# EAGLE board MCS (EAGLE 6.6.0)
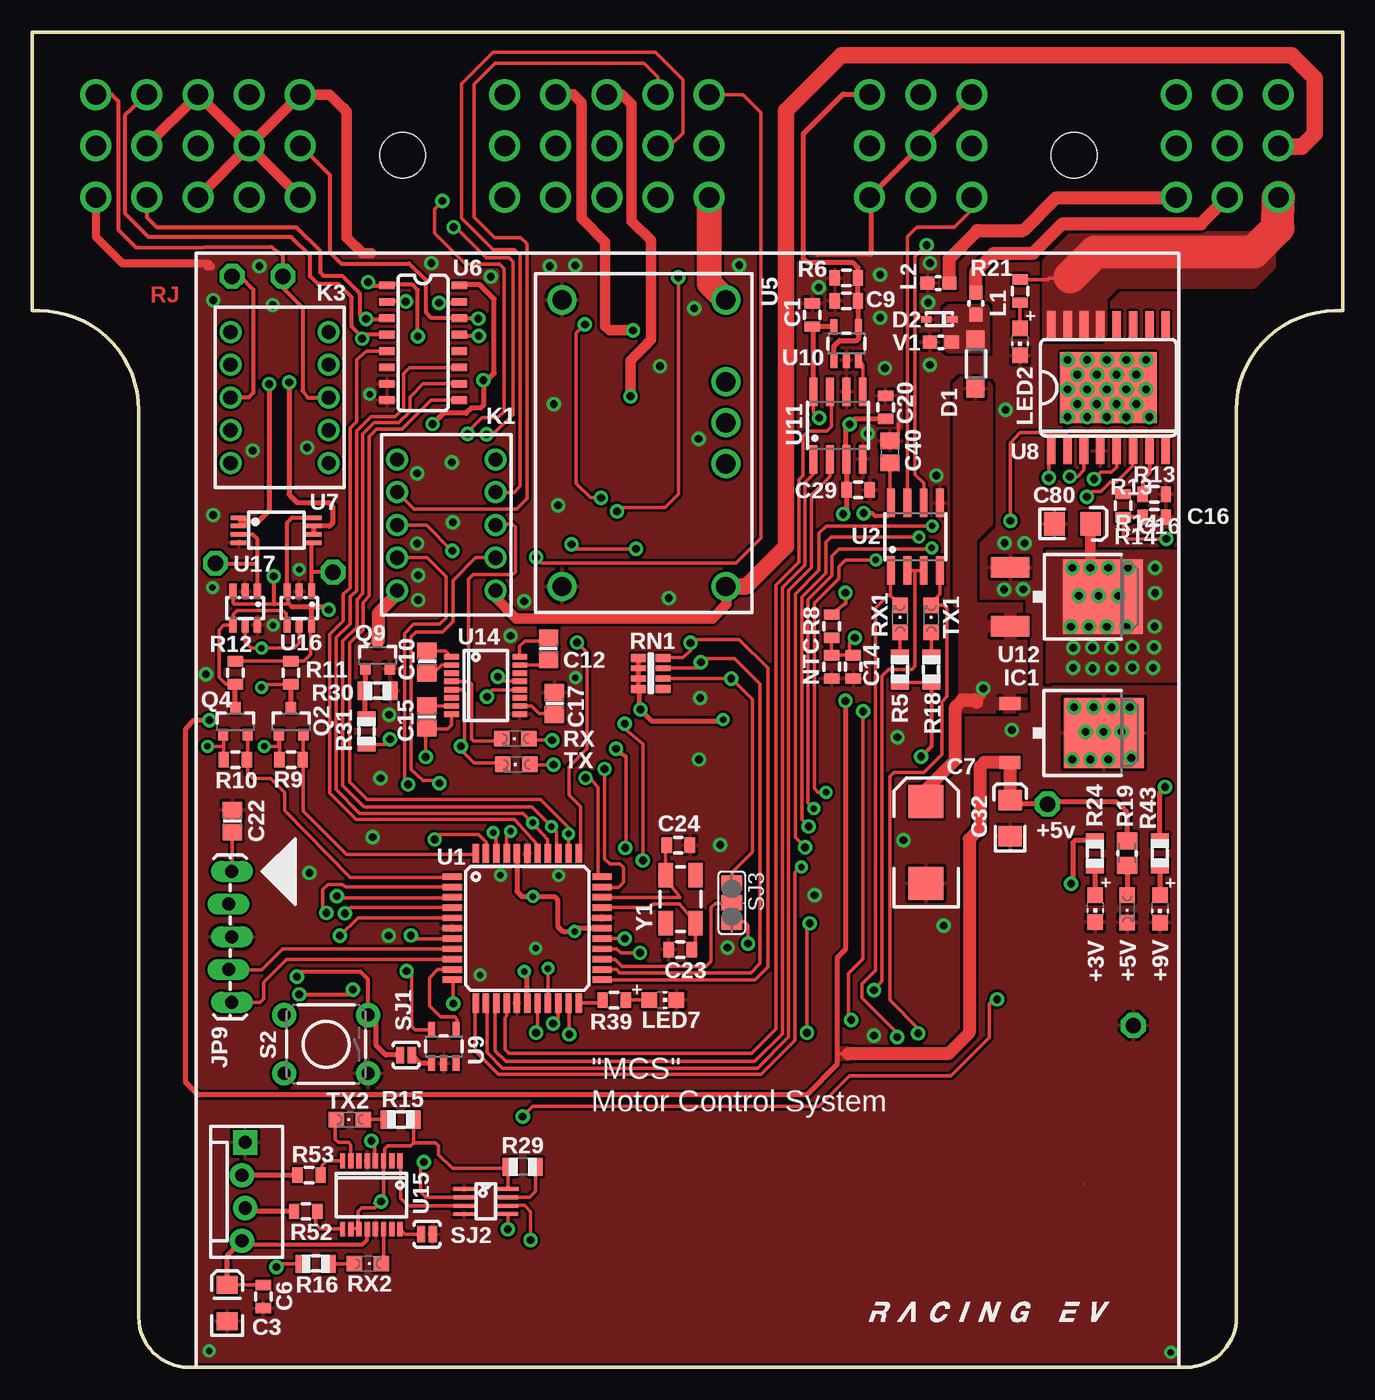
[diagram p0: board, top side]
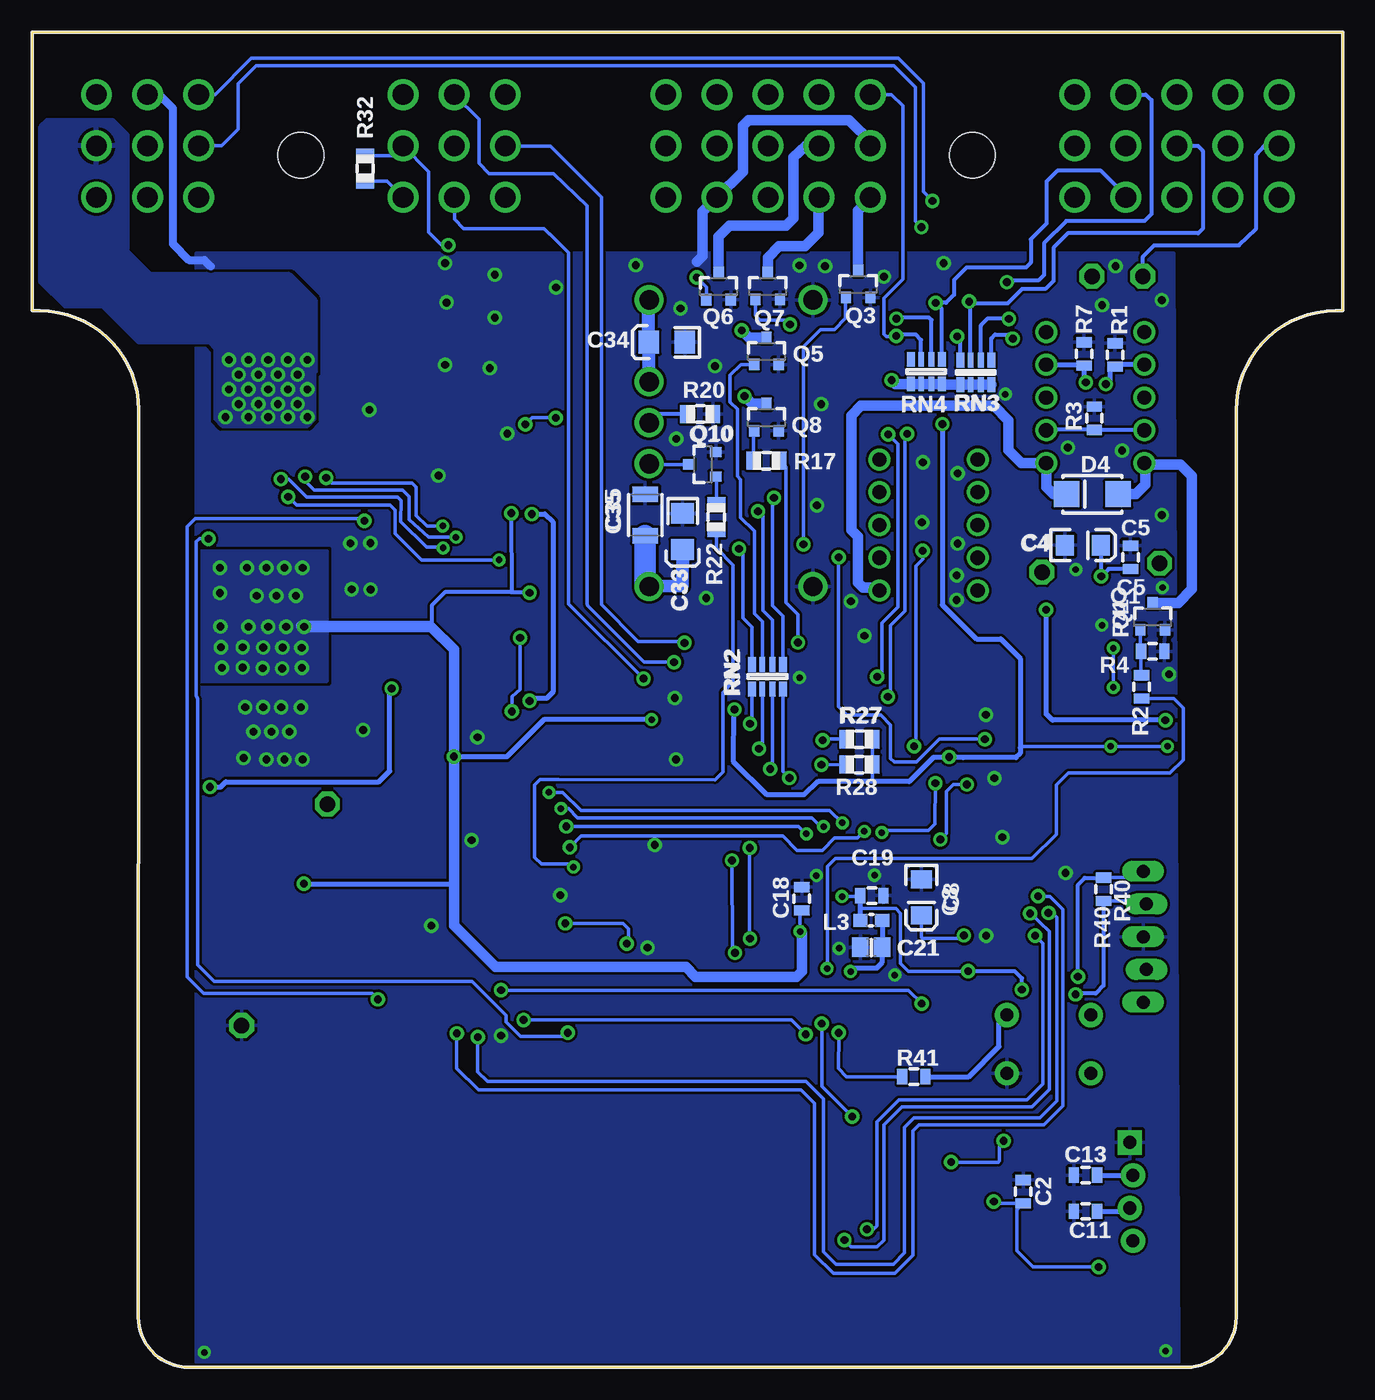
[diagram p1: board, bottom side, seen from below]

Size 101.6 x 103.51 mm. Coordinates in mm from the lower left corner, seen from the top.
Copper layers (1*16): Top 0.035mm / dielectric 1.5mm / Bottom 0.035mm
Design rules "SparkFun": minimum track width 8mil, minimum drill 20mil, track to track 8mil, track to pad 8mil, pad to pad 8mil, via to via 8mil, smd to smd 8mil, copper to edge 10mil, drill to drill 8mil, minimum pad ring 12mil, minimum via ring 10mil, stop-mask expansion 4mil, vias tented up to drill 25mil, thermal gap 10mil

## Footprints (pad centres in the part's own frame; a part is rotated, then mirrored left to right if it is on the bottom)
CHIP-LED0805 = smd 1.2 x 1.2: A 0,-1.05; C 0,1.05
CHIPLED_0805 = smd 1.2 x 1.2: A 0,-1.05; C 0,1.05
0805 = smd 0.8 x 1.2: 1 -0.9,0; 2 0.9,0
EIA3216 = smd 1.4 x 1.6: A 1.4,0; C -1.4,0
EIA7343 = smd 2.55 x 2.7: A 3.17,0; C -3.17,0
C0805 = smd 1.3 x 1.5: 1 -0.85,0; 2 0.85,0
POLC1206 = smd 1.6 x 1.8: 1 -1.4,0; 2 1.4,0
1210 = smd 1.2 x 2: 1 -1.6,0; 2 1.6,0
581-01-48-009 = drill 1.6: 1 -45.872,4.699; 2 -45.872,0.711; 3 -45.872,-3.277; 4 -41.91,4.699; 5 -41.91,0.711; 6 -41.91,-3.277; 7 -37.948,4.699; 8 -37.948,0.711; 9 -37.948,-3.277; 10 -33.985,4.699; 11 -33.985,0.711; 12 -33.985,-3.277; 13 -30.023,4.699; 14 -30.023,0.711; 15 -30.023,-3.277; 16 -14.173,4.699; 17 -14.173,0.711; 18 -14.173,-3.277; 19 -10.211,4.699; 20 -10.211,0.711; 21 -10.211,-3.277; 22 -6.248,4.699; 23 -6.248,0.711; 24 -6.248,-3.277; 25 -2.286,4.699; 26 -2.286,0.711; 27 -2.286,-3.277; 28 1.676,4.699; 29 1.676,0.711; 30 1.676,-3.277; 31 14.122,4.699; 32 14.122,0.711; 33 14.122,-3.277; 34 18.085,4.699; 35 18.085,0.711; 36 18.085,-3.277; 37 22.047,4.699; 38 22.047,0.711; 39 22.047,-3.277; 40 37.897,4.699; 41 37.897,0.711; 42 37.897,-3.277; 43 41.859,4.699; 44 41.859,0.711; 45 41.859,-3.277; 46 45.822,4.699; 47 45.822,0.711; 48 45.822,-3.277 | hole 3.556: -22.098,0; 29.972,0
SOD123 = smd 1.4 x 1.4: A 1.9,0; C -1.9,0
SOD-523F = smd 0.8 x 0.5: A -1,0; C 1,0
SMA-DIODE_ALT = smd 2 x 2: A -2,0; C 2,0
TO252 = smd 1 x 1.6: 1 -2.28,-4.8; 2 2.28,-4.8 | smd 5.4 x 6.2: 3 0,2.5
1X05_LOCK_LONGPADS = drill 1.016 long: 1 0,0; 2 2.54,-0.254; 3 5.08,0; 4 7.62,-0.254; 5 10.16,0
MOLEX-1X4_LOCK = drill 1.016 pad 1.88 square: 1 0,0.127 | drill 1.016 pad 1.88: 2 2.54,-0.127; 3 5.08,0.127; 4 7.62,-0.127
TQ2-2M-24V = drill 1.1: 1 -5.08,-3.81; 2 -2.54,-3.81; 3 0,-3.81; 4 2.54,-3.81; 5 5.08,-3.81; 6 5.08,3.81; 7 2.54,3.81; 8 0,3.81; 9 -2.54,3.81; 10 -5.08,3.81
0603 = smd 1.1 x 1: 1 -0.85,0; 2 0.85,0
SOT23-3 = smd 0.8 x 0.9: 1 -0.95,-1; 2 0.95,-1; 3 0,1.1
R0805 = smd 1.1 x 1.4: 1 -1,0; 2 1,0
M0805 = smd 1.3 x 1.6: 1 -0.95,0; 2 0.95,0
CRA06S = smd 0.63 x 1.15: 1 -1.2,-1; 4 1.2,-1; 5 1.2,0.9; 8 -1.2,0.9 | smd 0.44 x 1.15: 2 -0.4,-1; 3 0.4,-1; 6 0.4,0.9; 7 -0.4,0.9
TACTILE-PTH = drill 1.016 pad 1.88: 1 -3.251,2.261; 2 3.251,2.261; 3 -3.251,-2.261; 4 3.251,-2.261
SJ_2S-NO = smd 0.635 x 1.27: 1 -0.45,0; 2 0.45,0
PAD-JUMPER-2-NO_YES_SILK = smd 0.635 x 1.27: 1 -0.45,0; 2 0.45,0
PAD-JUMPER-3-NO_YES_SILK_FULL_BOX = smd 1.168 x 1.6: 1 -1.524,0; 2 0,0; 3 1.524,0
4952 = drill 1.2 pad 1.93 octagon: P$1 0,0
TQFP-44 = smd 1.5 x 0.5: 1 -5.8,4; 2 -5.8,3.2; 3 -5.8,2.4; 4 -5.8,1.6; 5 -5.8,0.8; 6 -5.8,0; 7 -5.8,-0.8; 8 -5.8,-1.6; 9 -5.8,-2.4; 10 -5.8,-3.2; 11 -5.8,-4; 23 5.8,-4; 24 5.8,-3.2; 25 5.8,-2.4; 26 5.8,-1.6; 27 5.8,-0.8; 28 5.8,0; 29 5.8,0.8; 30 5.8,1.6; 31 5.8,2.4; 32 5.8,3.2; 33 5.8,4 | smd 0.5 x 1.5: 12 -4,-5.8; 13 -3.2,-5.8; 14 -2.4,-5.8; 15 -1.6,-5.8; 16 -0.8,-5.8; 17 0,-5.8; 18 0.8,-5.8; 19 1.6,-5.8; 20 2.4,-5.8; 21 3.2,-5.8; 22 4,-5.8; 34 4,5.8; 35 3.2,5.8; 36 2.4,5.8; 37 1.6,5.8; 38 0.8,5.8; 39 0,5.8; 40 -0.8,5.8; 41 -1.6,5.8; 42 -2.4,5.8; 43 -3.2,5.8; 44 -4,5.8
SO-8 = smd 0.61 x 2.21: 1 -1.905,-2.616; 2 -0.635,-2.616; 3 0.635,-2.616; 4 1.905,-2.616; 5 1.905,2.616; 6 0.635,2.616; 7 -0.635,2.616; 8 -1.905,2.616
VFSOP-8 = smd 0.3 x 1.6: 1 -0.98,-1.7; 2 -0.33,-1.7; 3 0.33,-1.7; 4 0.98,-1.7; 5 0.97,1.69; 6 0.325,1.7; 7 -0.33,1.7; 8 -0.98,1.71
PTN78060HAH = drill 1.5: 1 2.032,14.732; 2 2.032,2.032; 3 11.557,2.032; 4 14.732,2.032; 5 17.907,2.032; 6 24.257,2.032; 7 24.257,14.732
SO016 = smd 0.6 x 1.2: 1 -4.445,-2.8; 2 -3.175,-2.8; 3 -1.905,-2.8; 4 -0.635,-2.8; 5 0.635,-2.8; 6 1.905,-2.8; 7 3.175,-2.8; 8 4.445,-2.8; 9 4.445,2.8; 10 3.175,2.8; 11 1.905,2.8; 12 0.635,2.8; 13 -0.635,2.8; 14 -1.905,2.8; 15 -3.175,2.8; 16 -4.445,2.8
TSSOP-08 = smd 1.2 x 0.35: 1 -2.925,0.975; 2 -2.925,0.325; 3 -2.925,-0.325; 4 -2.925,-0.975; 5 2.925,-0.975; 6 2.925,-0.325; 7 2.925,0.325; 8 2.925,0.975
SO-16-POWER = smd 2.032 x 0.66: 1 -4.902,4.445; 2 -4.902,3.175; 3 -4.902,1.905; 4 -4.902,0.635; 5 -4.902,-0.635; 6 -4.902,-1.905; 7 -4.902,-3.175; 8 -4.902,-4.445; 9 4.902,-4.445; 10 4.902,-3.175; 11 4.902,-1.905; 12 4.902,-0.635; 13 4.902,0.635; 14 4.902,1.905; 15 4.902,3.175; 16 4.902,4.445 | smd 5.5 x 7.5: EP 0,0
SOT23-5L = smd 0.55 x 1.2: 1 -0.95,-1.3; 2 0,-1.3; 3 0.95,-1.3; 4 0.95,1.3; 5 -0.95,1.3
SOT23-5 = smd 0.55 x 1.2: 1 -0.95,-1.3; 2 0,-1.3; 3 0.95,-1.3; 4 0.95,1.3; 5 -0.95,1.3
SO08 = smd 0.61 x 2.21: 1 -1.905,-2.616; 2 -0.635,-2.616; 3 0.635,-2.616; 4 1.905,-2.616; 5 1.905,2.616; 6 0.635,2.616; 7 -0.635,2.616; 8 -1.905,2.616
V-REG_DPACK = smd 1.6 x 3: 1 -2.28,-4.8; 3 2.28,-4.8 | smd 5.8 x 6.2: 4 0,2.38
SSOP-16 = smd 0.419 x 1.143: 1 -2.223,-2.642; 2 -1.587,-2.642; 3 -0.953,-2.642; 4 -0.318,-2.642; 5 0.318,-2.642; 6 0.953,-2.642; 7 1.587,-2.642; 8 2.223,-2.642; 9 2.223,2.642; 10 1.587,2.642; 11 0.953,2.642; 12 0.318,2.642; 13 -0.318,2.642; 14 -0.953,2.642; 15 -1.587,2.642; 16 -2.223,2.642
SOT23-6 = smd 0.55 x 1.2: 1 -0.95,-1.3; 2 0,-1.3; 3 0.95,-1.3; 4 0.95,1.3; 5 0,1.3; 6 -0.95,1.3
CRYSTAL-SMD-5X3 = smd 1.9 x 1.1: 1 -1.85,-1.15; 2 1.85,-1.15; 3 1.85,1.15; 4 -1.85,1.15

## Placement (x,y rotation side)
+3V  [CHIP-LED0805]  82.42,35.56 180 top
+5V  Green  [CHIPLED_0805]  84.89,35.53 180 top
+9V  [CHIP-LED0805]  87.43,35.53 180 top
C1  0.1uF  [0805]  60.48,81.58 90 top
C2  0.1uf  [0805]  24.76,13.61 90 bottom
C3  4.7uF  [EIA3216]  15.11,4.98 90 top
C4  10uF  [EIA3216]  20.14,63.73 0 bottom
C5  0.1uF  [0805]  16.46,62.79 90 bottom
C6  0.1uf  [0805]  17.91,5.49 270 top
C7  100uF  [EIA7343]  69.29,40.69 90 top
C8  10uF  [EIA3216]  32.66,36.42 270 bottom
C9  10pF  [0805]  63.12,82.68 180 top
C10  .1uF  [C0805]  30.61,54.69 270 top
C11  47pf  [0805]  19.94,12.09 180 bottom
C12  .1uF  [C0805]  40.03,55.7 270 top
C13  47pf  [0805]  19.94,14.88 180 bottom
C14  0.1uF  [0805]  63.65,54.31 270 top
C15  .1uF  [C0805]  30.58,50.42 270 top
C16  10pF  [0805]  86.99,65.91 0 top
C17  .1uF  [C0805]  40.49,51.46 270 top
C18  0.1uF  [0805]  41.94,36.32 90 bottom
C19  0.1uF  [0805]  36.5,36.58 0 bottom
C20  0.1uF  [0805]  66.17,74.42 90 top
C21  100n  [C0805]  36.55,32.56 180 bottom
C22  10n  [C0805]  15.52,42.34 90 top
C23  12pF  [0805]  50.24,32.39 180 top
C24  12pF  [0805]  50.09,40.46 0 top
C29  0.1uF  [0805]  64.03,68.02 0 top
C32  10uF  [POLC1206]  75.82,42.57 270 top
C33  10uF  [POLC1206]  51.18,64.8 90 bottom
C34  10uF  [POLC1206]  52.4,79.48 0 bottom
C35  1uf  [1210]  54.08,66.07 90 bottom
C40  .1uF  [C0805]  66.5,70.97 90 top
C80  10uF  [POLC1206]  80.65,65.39 180 top
CASE2  581-01-48-009  [581-01-48-009]  50.8,93.98 0 top
D1  1N4001  [SOD123]  73.13,77.78 90 top
D2  MM5Z30  [SOD-523F]  70.33,81.25 0 top
D4  [SMA-DIODE_ALT]  19.41,67.69 180 bottom
IC1  7805DT  [TO252]  80.59,49.17 270 top
JP9  ICSP  [1X05_LOCK_LONGPADS]  15.47,38.46 270 top
JP13  [MOLEX-1X4_LOCK]  16.38,17.42 270 top
K1  TQ2-2M-24V  [TQ2-2M-24V]  32.11,65.3 90 top
K3  TQ2-2M-24V  [TQ2-2M-24V]  19.18,75.18 90 top
L1  FB  [0603]  73.17,82.47 270 top
L2  FB  [0603]  70.26,84.04 180 top
L3  FB  [0603]  36.55,34.65 180 bottom
LED2  [CHIP-LED0805]  76.58,79.5 180 top
LED7  [CHIP-LED0805]  48.89,28.47 270 top
NTC  [0805]  61.98,54.31 90 top
Q1  BSS123  [SOT23-3]  14.73,58.17 0 bottom
Q2  BSS123  [SOT23-3]  20.07,50.04 0 top
Q3  BSS123  [SOT23-3]  37.57,83.95 0 bottom
Q4  BSS123  [SOT23-3]  15.75,50.04 0 top
Q5  BSS123  [SOT23-3]  44.68,78.74 0 bottom
Q6  BSS123  [SOT23-3]  48.39,83.77 0 bottom
Q7  BSS123  [SOT23-3]  44.58,83.79 0 bottom
Q8  BSS123  [SOT23-3]  44.68,73.61 0 bottom
Q9  BSS123  [SOT23-3]  26.77,55.17 0 top
Q10  BSS123  [SOT23-3]  49.61,70 90 bottom
R1  10k  [0805]  17.65,78.49 90 bottom
R2  1k  [0805]  15.6,52.76 270 bottom
R3  100  [0805]  19.25,73.58 90 bottom
R4  100k  [0805]  14.73,55.5 180 bottom
R5  1K  [R0805]  67.28,54.1 270 top
R6  10k  [0805]  63.12,84.45 0 top
R7  10k  [0805]  20.07,78.56 90 bottom
R8  10k  [0805]  61.98,57.45 90 top
R9  2k  [0805]  20.07,47.12 180 top
R10  2k  [0805]  15.75,47.12 180 top
R11  10k  [0805]  20.07,53.85 90 top
R12  10k  [0805]  15.75,53.85 90 top
R13  10k  [0805]  86.99,67.69 180 top
R14  10k  [0805]  84.58,66.8 270 top
R15  1K  [R0805]  28.57,19.2 0 top
R16  1k  [R0805]  21.97,8.03 180 top
R17  1K  [R0805]  44.68,70.31 180 bottom
R18  1k  [R0805]  69.7,54.1 270 top
R19  1K  [M0805]  84.89,39.85 270 top
R20  383k  [R0805]  49.81,73.91 180 bottom
R21  3.3k  [0805]  76.58,83.44 90 top
R22  1K  [R0805]  48.56,65.91 90 bottom
R24  499  [R0805]  82.4,39.83 90 top
R27  1K  [R0805]  37.46,48.69 0 bottom
R28  1k  [R0805]  37.46,46.74 0 bottom
R29  1K  [R0805]  38.02,15.54 180 top
R30  10K  [R0805]  26.77,52.45 0 top
R31  1K  [R0805]  25.91,49.3 90 top
R32  120  [R0805]  75.79,92.94 270 bottom
R39  499  [0805]  45.11,28.47 180 top
R40  10k  [0805]  18.54,37.06 270 bottom
R41  499  [0805]  33.25,22.53 180 bottom
R43  1.2k  [R0805]  87.43,39.85 90 top
R52  27  [0805]  21.21,12.09 0 top
R53  27  [0805]  21.46,14.88 0 top
RN1  RN-4  [CRA06S]  48.01,53.8 270 top
RN2  RN-4  [CRA06S]  44.6,53.59 0 bottom
RN3  RN-4  [CRA06S]  28.45,77.09 180 bottom
RN4  RN-4  [CRA06S]  32.28,77.14 180 bottom
RX  [CHIPLED_0805]  37.46,48.74 90 top
RX1  RED  [CHIPLED_0805]  67.28,58.04 0 top
RX2  [CHIPLED_0805]  26.03,8.03 270 top
S2  ts  [TACTILE-PTH]  22.78,25.04 180 top
SJ1  SJ-NO  [SJ_2S-NO]  28.98,24.21 180 top
SJ2  [PAD-JUMPER-2-NO_YES_SILK]  30.61,10.31 180 top
SJ3  [PAD-JUMPER-3-NO_YES_SILK_FULL_BOX]  54.23,36.02 270 top
TP1  TESTPOINT  [4952]  85.37,26.49 0 top
TP2  TESTPOINT  [4952]  78.71,43.66 0 top
TP3  TESTPOINT  [4952]  23.32,61.65 180 top
TP4  TESTPOINT  [4952]  15.49,84.58 0 top
TP5  TESTPOINT  [4952]  19.43,84.58 0 top
TP8  TESTPOINT  [4952]  14.2,62.33 180 top
TX  [CHIPLED_0805]  37.54,46.74 90 top
TX1  GREEN  [CHIPLED_0805]  69.7,58.04 0 top
TX2  [CHIPLED_0805]  24.64,19.2 90 top
U1  DSPIC33FJ128GP804  [TQFP-44]  38.38,34.04 0 top
U2  SN75HVD08DR  [SO-8]  68.48,64.39 0 top
U4  SN74LVC2G241DCTR  [VFSOP-8]  35.18,12.85 270 top
U5  PTN78060HAH  [PTN78060HAH]  55.8,58.5 90 top
U6  SN74HC251_SMD  [SO016]  30.3,79.43 270 top
U7  LM158  [TSSOP-08]  18.92,64.9 0 top
U8  VND7040AJTR-E  [SO-16-POWER]  83.44,75.95 90 top
U9  MAX823  [SOT23-5L]  31.9,24.87 0 top
U10  OPA344  [SOT23-5]  63.12,79.38 0 top
U11  X9015_DIGI_POTS  [SO08]  62.48,73.03 0 top
U12  NCP1117DT33T5G  [V-REG_DPACK]  80.62,59.74 270 top
U14  ADM3101E  [SSOP-16]  35.15,52.86 270 top
U15  FT230X  [SSOP-16]  26.29,13.36 180 top
U16  MCP4725  [SOT23-6]  20.7,58.85 180 top
U17  MCP4725  [SOT23-6]  16.51,58.85 180 top
U$1  LOGOM  [L-M]  57.35,1.5 0 top
U$2  INDPK1  [PICKIT-PIN-1]  17.83,38.43 270 top
V1  13Vdc  [0603]  70.44,79.47 0 top
Y1  12Mhz  [CRYSTAL-SMD-5X3]  50.27,36.3 90 top

## Library data of the parts
+3V +5V +9V C10 C12 C15 C17 C21 C22 C40 IC1 LED2 LED7 R5 R15-R20 R22 R24 R27-R32 R43 RX RX1 RX2 TX TX1 TX2 = adafruit
C1 C5 C9 C16 C20 C29 L3 NTC R1-R4 R6-R14 R21 R39 R40 R52 R53 SJ1-SJ3 = SparkFun-Passives
C2 C3 C6 C11 C13 = SparkFun
C4 C8 = SparkFun-Capacitors; PROD_ID: CAP-00811
C7 C14 C18 C19 C23 C24 C35 = SparkFun-Capacitors
C32-C34 C80 = RJ's_parts
CASE2 K1 K3 U1 U2 U5 U8 U14-U17 U$2 = FSAE Eletric
D1 = diode
D2 L1 L2 V1 = EmEndev
D4 = SparkFun-DiscreteSemi
JP9 JP13 = SparkFun-Connectors
Q1 = SparkFun-DiscreteSemi; PROD_ID: TRANS-00830; VALUE: 200mA/50V
Q2-Q10 = SparkFun-DiscreteSemi; PROD_ID: TRANS-08345
R41 = SparkFun-Resistors
RN1-RN4 = DFT2
S2 = SparkFun-Electromechanical
TP1-TP5 TP8 = Gilson
U4 = Cleaverbrooks
U6 = SparkFun-DigitalIC
U7 = DSL
U9 = NASA_LIB
U10 U11 = SparkFun-AnalogIC
U12 = SparkFun-PowerIC
U$1 = Pic
Y1 = SparkFun-FreqCtrl

## Nets
3V: C2.1 R15.2 R16.2 R29.2 U4.8 U15.3 U15.10 U15.11
12V-EN: R22.1 U1.12
!CS: U1.15 U11.7
!RST: U1.20 U8.2
+: CASE2.45 L1.1
+3V3: C15.2 C18.1 C19.1 C40.1 C80.1 JP9.2 L3.2 Q2.1 Q4.1 R5.2 R8.2 R9.2 R10.2 R18.2 R24.2 R27.2 R28.2 R40.2 RN1.1 RN1.2 RN1.3 RN1.4 RN3.5 RN3.6 RN3.7 RN3.8 RN4.6 RN4.7 RN4.8 U1.28 U1.40 U2.8 U6.16 U9.5 U12.4 U14.8
+5V: C1.1 C4.A C5.1 C20.1 C29.1 C32.1 IC1.2 R11.2 R12.2 R19.1 TP2.P$1 U7.8 U10.5 U11.3 U11.8 U16.3 U16.6 U17.3
+9V: C7.A D1.C IC1.1 R43.2 U12.3
+12V: C34.1 CASE2.30 U5.5 U5.6
+24V: C33.1 C35.1 CASE2.47 D4.C K1.1 K3.1 U5.2 U8.EP
-: CASE2.42 L2.1
A: U1.37 U6.11 U8.6
ASEN: C16.1 R14.2 SJ3.3
B: U1.36 U6.10 U8.5
BOX_TEMP: C14.1 NTC.2 R8.1 U1.21
C: U1.35 U6.9 U8.3
DAC-EN: R2.2 U1.19
FAN: CASE2.48 R21.2 U8.13 U8.14 U8.15 U8.16
FAN-PWM: U1.41 U8.1
GND: +3V.C +5V.C +9V.C C1.2 C2.2 C3.C C4.C C5.2 C6.2 C7.C C8.C C9.2 C11.2 C13.2 C14.2 C16.2 C17.1 C18.2 C19.2 C20.2 C21.2 C22.2 C23.2 C24.2 C29.2 C32.2 C33.2 C34.2 C35.2 C40.2 C80.2 CASE2.3 CASE2.5 CASE2.7 CASE2.9 CASE2.11 CASE2.13 CASE2.15 CASE2.17 CASE2.27 CASE2.33 CASE2.35 CASE2.37 CASE2.43 D2.A IC1.3 JP9.3 JP13.1 L2.2 LED2.C LED7.C NTC.1 Q1.2 Q3.2 Q5.2 Q6.2 Q7.2 Q8.2 Q9.2 Q10.2 R1.2 R3.2 R4.1 R6.1 R7.2 R13.1 R20.1 R30.2 S2.1 SJ2.1 TP1.P$1 U1.6 U1.16 U1.29 U1.39 U2.5 U4.1 U4.4 U5.1 U5.7 U6.7 U6.8 U7.4 U8.4 U9.2 U10.2 U11.4 U11.6 U12.1 U14.9 U15.5 U15.13 U16.2 U17.2 U17.6 V1.1
INC: U1.14 U11.1
MC1-B: RN2.3 U1.32
MC1-F: RN2.1 U1.26
MC1-PE: RN2.4 U1.33
MC1-R: RN2.2 U1.27
MC1-RE: R17.1 U1.34
MC-1-B: CASE2.2 K3.8 TP4.P$1
MC-1-T: CASE2.1 K3.3 TP5.P$1
MC-PG-EN: CASE2.28 R31.1
MCRX: K1.3 RX.C U14.4
MCTX: K1.8 TX.C U14.5
N$1: C22.1 JP9.1 R40.1 R41.1 S2.3 SJ1.2
N$2: C21.1 L3.1 U1.17
N$3: K3.7 R1.1 U7.1 U7.2
N$4: C8.A U1.7
N$5: R39.2 U1.22
N$6: +9V.A R43.1
N$7: Q3.1 RN2.8
N$8: R41.2 U1.18
N$9: CASE2.18 Q3.3
N$10: SJ1.1 U9.1
N$11: R15.1 TX2.A
N$12: JP9.4 U1.8
N$13: TX2.C U15.7
N$14: RX2.C U15.14
N$15: JP9.5 U1.9
N$16: R16.1 RX2.A
N$17: TP3.P$1 U7.5 U16.1
N$18: K3.4 R7.1 U7.6 U7.7
N$19: U4.2 U15.4
N$20: Q5.1 RN2.7
N$21: K3.2 K3.9 R3.1
N$22: TP8.P$1 U7.3 U17.1
N$23: LED2.A R21.1
N$24: U10.3 U11.5
N$25: +3V.A R24.1
N$26: CASE2.19 Q5.3
N$27: U4.3 U15.1
N$28: R52.2 U15.9
N$29: Q6.1 RN2.6
N$30: CASE2.20 Q6.3
N$31: R18.1 TX1.A
N$32: R5.1 RX1.A
N$33: SJ3.2 U1.25
N$35: Q8.1 R17.2
N$37: LED7.A R39.1
N$39: C24.1 U1.31 Y1.3
N$40: C23.1 U1.30 Y1.1
N$41: +5V.A R19.2
N$42: Q1.1 R2.1 R4.2
N$43: D4.A K3.10 Q1.3
N$45: R13.2 R14.1 U8.7
N$54: R53.2 U15.8
N$55: C11.1 JP13.3 R52.1
N$59: C10.1 U14.1
N$61: C13.1 JP13.2 R53.1
N$62: SJ2.2 U15.16
N$63: D1.A D2.C L1.2 V1.2
N$65: C10.2 U14.2
N$66: C12.1 U14.16
N$67: C12.2 U14.15
N$68: C15.1 U14.7
N$69: R29.1 U4.7
N$70: CASE2.21 Q7.3
N$71: CASE2.22 Q8.3
N$72: C17.2 U14.10
N$73: CASE2.40 U14.12
N$74: CASE2.41 U14.13
N$75: R27.1 RX.A
N$76: R28.1 TX.A
N$77: K1.10 Q9.3
N$78: Q9.1 R30.1 R31.2
N$79: R20.2 U5.4
N$80: Q10.3 U5.3
N$81: Q7.1 RN2.5
N$82: Q10.1 R22.2
N$85: C3.A C6.1 JP13.4 U15.12
OUT: U1.38 U6.5
OUT-RX: CASE2.26 K1.4
OUT-TX: CASE2.25 K1.7
PUMP_OUTPUT_CONTROL: C9.1 CASE2.31 R6.2 U10.1 U10.4
RS-A: CASE2.38 R32.1 U2.6
RS-B: CASE2.39 R32.2 U2.7
RX2: K1.2 U1.42
RX3: U1.4 U4.6
RXD1: RX1.C U1.2 U2.1
SCL: Q2.2 R9.1 U1.44
SCL_5V: Q2.3 R11.1 U16.5 U17.5
SDA: Q4.2 R10.1 U1.1
SDA_5V: Q4.3 R12.1 U16.4 U17.4
SP1: CASE2.4 RN3.1 U6.4
SP2: CASE2.6 RN3.2 U6.3
SP3: CASE2.8 RN3.3 U6.2
SP4: CASE2.10 RN3.4 U6.1
SP5: CASE2.12 RN4.1 U6.15
SP6: CASE2.14 RN4.2 U6.14
SP7: CASE2.16 RN4.3 U6.13
TEMP1: CASE2.32 RN1.8 U1.23
TEMP2: CASE2.34 RN1.7 U1.24
TEMP3: CASE2.36 RN1.6 SJ3.1
TEMP4: RN1.5
TX2: K1.9 U1.43
TX3: U1.5 U4.5
TXD1: TX1.C U1.3 U2.4
U5-RE/DE: U1.11 U2.2 U2.3
UP/!DN: U1.13 U11.2
WDI: U1.10 U9.4

## Tracks (layer width: path | path; a pad name or v marks a point on that pad's centre or on a via)
3V  (via drill 0.6)
  Top 0.254: 25.27,10.78 25.27,12.09 25.53,12.34 26.54,12.34 v27.05,12.85 26.91,12.71 26.54,12.71 27.24,13.41 U15.3 27.31,16.07 27.31,16.92 27.56,17.17 29.34,17.17 29.58,17.41 | 25.27,10.78 U15.11 | 25.27,10.78 24.77,10.78 U15.10 | R16.2 19.18,8.03 v18.92,7.77 | R15.2 29.58,17.41 | U4.8 36.89,15.41 | 36.89,15.41 R29.2 | 36.89,15.41 32.57,15.41 31.5,16.48 31.5,17.17 31.27,17.4 29.58,17.4 29.58,17.41
  Bottom 0.254: v27.05,12.85 26.91,12.71 C2.1 25.27,12.21 25.27,9.04 24,7.77 v18.92,7.77
12V-EN  (via drill 0.5)
  Top 0.254: U1.12 34.34,28.2 34.34,24.51 36.14,22.71 56.49,22.71 59.13,25.35 59.13,38.38 59.54,38.79 v59.64,38.79
  Bottom 0.254: R22.1 48.56,63.5 47.27,62.2 47.27,53.11 48.06,52.32 48.06,46.15 48.67,45.54 60.81,45.57 62.23,45.57 62.64,45.16 62.64,39.52 62.13,39.01 59.87,39.01 v59.64,38.79
!CS
  Top 0.254: U1.15 36.78,27.23 36.65,27.1 36.65,24.64 36.96,24.33 55.75,24.33 57.66,26.24 57.66,60.65 59.44,62.43 59.44,68.81 59.77,69.14 59.77,72.16 60.2,72.59 61.62,72.59 61.95,72.92 61.95,75.54 U11.7
!RST  (via drill 0.6)
  Top 0.254: U1.20 40.78,27.04 v40.39,26.64 | v38.02,19.43 38.02,19.46 38.79,20.22 60.99,20.22 63.37,22.61 71.22,22.61 74.19,25.58 74.19,28.19 74.52,28.52 v74.8,28.52 | v75.84,65.63 75.84,71.65 76.56,72.47 80.09,72.47 80.26,72.29 U8.2
  Bottom 0.254: v40.39,26.64 40.39,21.79 v38.02,19.43 | v75.84,65.63 75.69,65.79 88.98,65.79 89.59,65.18 89.59,30.25 88.32,28.98 75.26,28.98 v74.8,28.52
+
  Top 1.016: L1.1 73.17,84.99 74.55,86.36 77.6,86.36 79.88,88.65 90.6,88.65 CASE2.45
+3V3  (via drill 0.5, 0.6)
  Top 0.254: U14.8 32.51,49.81 32.21,49.5 30.65,49.5 C15.2 30.51,49.49 v30.51,47.32 | R18.2 R5.2 | Q4.1 14.85,48.99 R10.2 14.85,48.02 14.73,48.13 v13.59,48.13 | R9.2 19.17,48.99 Q2.1 19.12,48.2 19.05,48.13 v17.98,48.13 | C40.1 66.5,67.08 U2.8 | U9.5 29.69,26.17 29.41,26.44 29.41,30.33 v29.03,30.71
  Top 0.305: U2.8 66.57,66.24 66.32,65.99 65.35,65.99 65.13,66.22 v64.47,66.22 | v63.04,60.05 63.04,59.19 R8.2 | R18.2 69.7,48.13 v68.91,47.35 | v20.7,28.9 24.49,28.9 v24.87,29.29
  Top 0.406: v34.98,76.53 35,76.53 | U6.16 33.18,83.95 34.67,83.95 35.81,82.83 35.81,77.06 35.28,76.53 35,76.53 | 35,76.53 34.98,76.5 34.98,74.57 34.77,74.37 34.06,74.37 33.66,73.96 31.88,73.96 v31.04,73.13 | RN1.1 RN1.2 RN1.3 RN1.4 47.09,52.51 47.09,51.05 v47.16,50.99 48.03,50.11 53.47,50.11 v53.57,50.22 | U1.28 42.32,34.04 v42.06,33.78 42.04,33.81 41.12,33.81 40.74,34.19 40.74,36.25 40.49,36.5 v38.81,36.5 37.97,36.5 37.58,36.89 U1.40 | R24.2 80.83,40.83 80.67,40.67 80.67,37.62 v80.54,37.49
  Top 0.813: C80.1 82.05,63.33 | 82.05,63.33 82.04,63.32 | 82.05,63.33 v82.05,61.98 v82.04,61.98
  Bottom 0.254: v42.06,33.78 42.06,35.29 C18.1 | R27.2 R28.2 36.47,45.56 36.32,45.41 | v13.59,48.13 v17.98,48.13 24.89,48.13 24.99,48.03 | 37.4,34.42 L3.2 | 29.46,47.29 30.4,47.29 v30.51,47.32 | R40.2 15.46,36.16 JP9.2 | v29.03,30.71 33.68,30.71 34.29,31.32 34.29,35.18 34.65,35.56 37.4,35.56 | v38.81,36.5 37.48,36.5 C19.1
  Bottom 0.305: v64.47,66.22 64.44,60.1 | 64.44,60.1 63.09,60.1 v63.04,60.05 | 64.44,60.1 69.6,60.1 70.64,59.05 70.64,57.43 70.66,57.4 | R40.2 18.54,29.59 19.15,28.98 20.4,28.98 v20.7,28.9 | v24.87,29.29 24.87,30.15 25.43,30.71 v29.03,30.71
  Bottom 0.406: v31.04,73.13 31.04,59.11 28.4,56.46 26.52,56.46 24.99,54.94 24.99,48.03 24.99,47.6 25.32,47.27 29.44,47.27 29.46,47.29 31.72,47.29 33.6,45.41 36.32,45.41 40.67,45.41 41.78,44.37 44.63,44.37 47.22,46.94 47.19,50.95 v47.16,50.99 | 37.4,34.42 37.4,35.56 C19.1 | v53.57,50.22 61.93,50.22 64.82,47.32 68.88,47.32 v68.91,47.35 | v80.54,37.49 69.19,37.49 68.91,37.77
  Bottom 0.813: RN3.8 RN3.7 RN3.6 RN3.5 31.03,76.19 RN4.8 RN4.7 RN4.6 34.69,76.24 v34.98,76.53 | v80.52,57.4 70.66,57.4 68.91,55.65 v68.91,47.35 68.91,37.77 68.91,34.26 65.68,31.04 50.93,31.04 50.17,30.28 42.37,30.28 41.94,30.71 41.94,33.65 v42.06,33.78 | 80.75,57.45 70.89,57.45
  other vias: 80.64,61.98 83.44,61.98 84.96,61.98 81.91,57.4 83.31,57.4 84.84,57.4 81.15,59.82 82.68,59.82 84.2,59.82 85.29,55.83 80.72,55.78 80.7,54.23 82.19,55.8 82.22,54.18 83.69,55.8 83.74,54.2 85.29,54.25 87.05,61.98 87.05,60.02 87.02,57.43 86.97,55.83 86.89,54.23
  pour Top (no thermals): 78.74,63.25 88.9,63.25 88.9,53.21 78.87,53.21 78.74,53.09
  pour Bottom: 78.74,63.25 88.9,63.25 88.9,53.21 78.74,53.21
+5V  (via drill 0.6)
  Top 0.254: R12.2 R11.2 21.09,54.75 21.59,55.24 21.59,57.49 | 19.81,60.09 U16.3 | U17.3 15.56,59.27 15.67,59.16 18.77,59.16 19.69,59.16 19.81,59.28 | U11.8 60.58,74.04 v61.01,73.61 | 63.09,70.43 U11.3 | 63.25,24.31 62.48,24.31 62.41,24.23
  Top 0.305: U16.3 19.75,65.47 20.17,65.89 21.83,65.89 U7.8 | 21.62,57.59 U16.6 | 19.81,60.09 19.81,59.28 20.12,58.98 | v18.72,61.32 18.72,59.21 18.77,59.16
  Top 0.406: U16.3 19.69,60.15 | 21.59,57.49 U16.6 21.65,58.94 | U10.5 60.49,80.67 C1.1 60.58,80.58 U11.8 | 20.12,58.98 21.62,58.98 21.65,58.94 | U11.3 63.12,68.04 C29.1 63.13,66.38 v62.87,66.14 | 63.09,70.43 63.09,72.82 v63.37,73.1 63.79,73.52 C20.1 | v63.04,51.66 63.04,32.38 62.41,31.75 62.41,24.23 62.41,23.47 60.05,21.11 12.88,21.11 11.91,22.07 11.91,49.5 12.57,50.16 v13.74,50.16 | v22.99,58.72 22.96,58.72 22.76,58.93 21.67,58.93 21.65,58.94 | R19.1 84.89,43 84.05,43.84 78.89,43.84 TP2.P$1 76.13,43.66 C32.1
  Top 1.016: C32.1 75.79,43.99 IC1.2 73.82,46.89 73.48,46.56 73.48,41.78 72.64,40.94 72.64,25.93 71.02,24.31 63.25,24.31
  Bottom 0.254: C5.1 18.12,61.89 18.67,61.34 | v61.01,73.61 62.87,73.61 v63.37,73.1
  Bottom 0.305: C4.A 18.74,61.17 v18.72,61.32 18.15,61.89 C5.1
  Bottom 0.406: v62.87,66.14 61.85,66.17 61.24,65.56 61.24,52.35 61.72,51.87 62.84,51.87 v63.04,51.66 | v13.74,50.16 22.5,50.16 22.99,50.65 v22.99,58.72
  pour Top: 63.27,23.88 62.41,23.88 62.36,23.93 62.36,24.66 62.46,24.77 63.22,24.77 63.27,24.71
+9V  (via drill 0.6)
  Top 0.406: R43.2 87.43,44.58 v87.83,44.98 | v73.74,52.63 73.74,52.07 73.23,51.56
  Top 1.016: C7.A 69.29,44.81 71.58,47.09 71.58,51.21 72.11,51.74 73.05,51.74 73.23,51.56
  Bottom 0.406: v87.83,44.98 87,44.98 86.59,45.39 74.73,45.39 73.89,46.23 73.89,52.48 v73.74,52.63
  pour Top: 72.26,58.45 72.26,51.21 76.71,51.18 76.71,58.8 72.9,58.8
  pour Top: 73.89,76.73 71.98,76.71 71.5,76.23 71.5,59.11 72.03,58.57 72.85,58.57 73.13,58.85 73.13,64.14 74.37,65.38 74.35,76.05
+12V
  Top 1.93: CASE2.30 52.48,84.05 U5.6
  Bottom 1.016: U5.5 53.77,79.45 C34.1 53.8,82.72 U5.6
+24V  (via drill 0.6)
  Top 0.305: v83.31,75.82 U8.EP
  Top 0.813: U5.2 53.82,60.48 53.82,59.16 52.73,58.06 37.52,58.06 35.92,59.66 K1.1
  Top 1.27: U5.2 55.32,60.53 58.42,63.63 58.42,97.41 62.74,101.73 97.66,101.73 99.44,99.95 99.44,95.63 98.43,94.61 96.7,94.61 CASE2.47
  Bottom 0.305: 22.96,68.22 22.96,69.95 23.11,70.1
  Bottom 0.813: D4.C 22.43,67.69 22.96,68.22 22.96,70.08 K3.1 | 23.11,70.1 24.89,70.1 25.91,71.12 25.91,73.41 27.05,74.55 37.34,74.55 38.1,73.79 38.1,64.9 37.59,64.39 37.59,60.83 37.21,60.45 36.14,60.45 K1.1
  Bottom 1.016: C33.1 51.21,60.58 U5.2
  Bottom 1.676: C35.1 54.08,60.83 U5.2
  other vias: 80.26,78.11 81.79,78.11 83.31,78.11 84.84,78.11 86.36,78.11 81.03,76.96 82.55,76.96 84.07,76.96 85.6,76.96 80.26,75.82 81.79,75.82 84.84,75.82 86.36,75.82 81.03,74.68 82.55,74.68 84.07,74.68 85.6,74.68 80.26,73.66 81.79,73.66 83.31,73.66 84.84,73.66 86.61,73.66
  pour Bottom: 79.63,77.22 79.63,82.68 81.66,84.71 92.46,84.71 94.23,86.49 94.23,95.5 95.38,96.65 100.46,96.65 100.97,96.14 100.97,84.2 99.06,82.3 96.14,82.3 93.34,79.5 87.88,79.5 87.38,78.99 87.38,73.53 86.87,73.03 80.26,73.03 79.76,73.53 79.76,77.09
-
  Top 1.016: L2.1 71.11,85.96 73.28,88.14 76.84,88.14 79.38,90.68 88.67,90.68 CASE2.42
A  (via drill 0.5, 0.6)
  Top 0.254: U6.11 29.26,77.52 28.78,77.04 28.78,74.35 28.14,73.71 26.29,73.71 25.15,72.57 25.15,60.2 24.64,59.74 24.64,57.63 23.57,56.57 23.57,44.78 25.4,42.95 38.05,42.95 v38.8,42.2 39.95,40.92 39.95,39.86 U1.37 | U1.37 | U8.6 85.34,69.93 84.05,68.63 83.59,68.63 82.85,67.89 82.17,67.89 v81.76,67.49 | v65.41,62.59 63.04,62.59 62.53,62.08 62.53,61.14 60.63,59.23 60.63,44.86 60.66,44.86 60.93,44.58 v61.54,44.58
  Bottom 0.254: v81.76,67.49 81.1,66.83 73.84,66.83 73.48,66.47 73.48,64.64 71.42,62.59 v65.41,62.59 | v61.54,44.58 60.48,44.58 59.06,43.15 39.78,43.15 v38.8,42.2
ASEN  (via drill 0.6)
  Top 0.254: 84.59,65.91 84.59,64.43 84.81,64.21 87.91,64.21 v87.93,64.24 | v60.07,25.93 60.07,34.01 v60.27,34.42 | v55.5,32.84 55.5,34.26 55.22,34.54 54.28,34.54 SJ3.3
  Top 0.305: C16.1 84.59,65.91 R14.2
  Bottom 0.254: v60.07,25.93 60.35,25.65 63.73,25.65 64.85,26.77 64.85,27.28 67.49,29.92 87.5,29.92 88.77,31.19 88.77,51.82 88.87,52.1 88.87,64.03 88.62,64.24 v87.93,64.24 | v60.27,34.42 55.8,34.42 55.37,33.98 55.37,32.97 v55.5,32.84
B  (via drill 0.5, 0.6)
  Top 0.254: U6.10 30.3,76.25 29.29,75.23 29.29,74.09 28.42,73.23 26.52,73.23 25.63,72.34 25.63,59.99 25.17,59.54 25.17,57.4 24.08,56.31 24.08,45.11 25.73,43.46 38.76,43.46 v40.25,41.92 40.64,41.5 40.64,40 U1.36 | U8.5 84.07,69.8 83.67,69.39 82.85,69.39 v82.32,68.86 | v69.75,63.53 69.62,63.45 62.56,63.45 62,62.89 62,61.37 60.15,59.51 60.15,43.76 v60.6,43.31
  Bottom 0.254: v82.32,68.86 81.74,68.86 80.34,67.46 73.25,67.46 73,67.21 73.03,65.56 71.04,63.58 69.85,63.58 v69.75,63.53 | v60.6,43.31 60.02,43.31 59.31,42.6 41.15,42.6 40.36,41.81 v40.25,41.92
BOX_TEMP  (via drill 0.6)
  Top 0.254: R8.1 NTC.2 | NTC.2 C14.1 | NTC.2 63.34,55.2 63.37,55.17 63.37,56.16 v63.78,56.57 | v64.41,50.85 64.39,31.65 63.27,30.53 63.27,27.15 v63.5,26.92 | v41.63,25.81 41.63,28.18 U1.21
  Bottom 0.254: v63.78,56.57 63.78,52.55 64.41,52.02 v64.41,50.85 | v63.5,26.92 42.75,26.92 v41.63,25.81
C  (via drill 0.5, 0.6)
  Top 0.254: U6.9 30.94,74.98 28.68,72.72 26.7,72.72 26.11,72.14 26.11,59.79 25.65,59.31 25.65,57.18 24.61,56.13 24.61,45.36 25.96,44.02 39.42,44.02 41.58,41.86 v41.58,41.35 U1.35 | U8.3 81.53,69.54 81.05,69.06 v80.44,69.06 | v68.76,64.36 61.93,64.36 61.52,63.98 61.52,61.57 59.66,59.72 59.66,42.47 v60.2,41.94
  Bottom 0.254: v80.44,69.06 80.44,68.71 79.73,68 72.87,68 72.39,67.51 72.39,65.73 70.87,64.36 v68.76,64.36 | v60.2,41.94 42.19,41.94 v41.58,41.35
DAC-EN  (via drill 0.5)
  Top 0.254: v39.98,30.91 U1.19 | U1.19
  Bottom 0.254: R2.2 13.1,51.86 12.37,51.13 12.37,47.09 13.39,46.08 21.29,46.08 22.2,45.16 22.2,41.33 24.08,39.45 39.32,39.45 39.93,38.84 39.93,38.43 39.95,31.06 v39.98,30.91
FAN
  Top 0.254: R21.2 78.75,84.34 78.87,84.45 80.39,84.45 80.47,84.54
  Top 2.54: 80.47,84.54 82.42,86.49 94.72,86.49 96.57,88.34 96.6,90.68 CASE2.48
  pour Top (no thermals): 78.49,79.76 82.8,79.76 83.19,80.14 83.19,82.93 84.07,83.82 94.74,83.82 96.27,85.34 96.27,86.61 95,87.88 80.64,87.88 78.49,85.73
FAN-PWM  (via drill 0.5, 0.6)
  Top 0.254: v78.82,68.96 78.82,70.87 U8.1 | v69.77,65.23 61.57,65.23 61.01,64.69 61.01,61.8 59.16,59.94 59.16,41.07 v59.92,40.31 | v37.08,41.55 36.93,41.55 36.78,41.4 U1.41 | U1.41
  Bottom 0.254: v69.77,65.23 70.97,65.23 71.86,66.01 71.86,68.25 72.16,68.55 78.38,68.55 78.82,68.94 78.77,68.91 v78.82,68.96 78.84,68.99 | v59.92,40.31 59.06,41.17 43.38,41.17 42.29,40.08 40.34,40.08 39.4,41.02 37.62,41.02 v37.08,41.55
GND  (via drill 0.5, 0.6)
  Top 0.254: C40.2 66.59,71.82 67.16,72.39 67.16,73.15 67.18,73.18
  Top 0.305: CASE2.9 12.93,90.7 16.92,94.69 16.92,94.97 18.69,96.75 18.9,96.75 20.42,98.27 20.45,98.27 20.83,98.65
  Top 0.406: CASE2.37 68.88,94.72 CASE2.35 64.92,90.73 CASE2.33 65,90.63 65.02,89.81 65.02,86.28 60.88,86.28
  Top 0.61: CASE2.3 4.93,87.66 6.99,85.6 13.59,85.6 | 13.59,85.6 13.84,85.34 | CASE2.15 20.78,90.73 | CASE2.9 12.85,90.73 | CASE2.7 12.85,98.65 | 13.59,85.6 13.59,85.37 13.56,85.34
  Top 0.813: CASE2.5 8.89,94.72 CASE2.7 16.81,94.72 | 16.81,94.72 CASE2.13 | CASE2.11 16.81,94.72 | 12.85,90.73 CASE2.11 | CASE2.11 16.81,94.67 CASE2.15 | 20.83,98.65 23.06,98.65 24.08,97.64 24.1,97.64 24.38,97.36 24.38,87.58 25.6,86.36 26.29,86.36
  Bottom 0.61: CASE2.43 91.77,98.68 90.7,97.61 90.7,87.1 89.46,85.85 88.27,85.85 87.76,85.34
  Bottom 0.813: CASE2.17 36.63,95.05 38.15,96.57 38.18,96.57 38.28,96.67 46.08,96.67 46.51,96.24 46.51,92.71 CASE2.27 49.63,89.59 49.63,86.13 50.06,85.7
  other vias: 13.72,1.27 88.27,1.14 30.94,85.6 35.56,84.56 40.13,85.37 42.11,85.42 26.16,75.44 32.54,70.15 18.64,82.35 17.6,85.37 14.02,82.73 17.09,71.07 21.31,71.3 14.02,66.07 40.44,74.68 40.77,66.83 54.81,85.45 51.33,82.09 42.11,53.47 75.39,63.91 76.94,63.88 75.36,60.3 76.83,60.33 80.77,51.18 82.3,51.18 83.69,51.18 85.09,51.18 81.66,49.28 80.64,47.12 82.04,47.12 83.44,47.12 85.22,47.24 83.06,49.28 84.45,49.28 69.6,77.72 69.6,85.6 69.47,82.55 13.46,53.72 18.67,57.53 20.7,61.85 13.97,60.45 66.12,77.47 65.74,84.71 65.74,81.38 27.66,50.6 29.92,61.39 32.61,65.51 29.84,69.32 29.84,63.86 40.82,38.13 29.92,59.49 36.3,38.15 34.72,30.4 39.04,32.49 37.08,56.72 38.13,59.39 70.1,69.14 64.77,72.39 27,45.67 51.69,47.12 51.79,51.89 49.35,59.64 48.67,77.62 51.66,71.98 75.46,74.22 75.95,49.4 70.66,34.24 67.54,40.87 60.66,36.6 27.64,33.45 21.49,38.33 26.39,41.1 65.25,25.7 67.08,48.84 60.99,83.72 53.34,40.49 53.9,32.54
  pour Bottom (rank 6): 13.08,86.36 88.9,86.36 88.9,0.38 12.7,0.38
  pour Top (rank 6): 12.7,86.36 88.9,86.36 88.9,0.38 12.7,0.38
INC
  Top 0.254: U1.14 35.89,28.15 35.89,24.54 36.73,23.7 56.01,23.7 58.17,25.86 58.17,60.45 59.92,62.2 59.92,68.58 60.58,69.24 U11.1
MC1-B  (via drill 0.6)
  Top 0.254: v44.37,46.38 44.37,39.42 44.78,39.01 45.57,39.01 45.85,38.73 45.85,37.59 45.47,37.21 44.2,37.21 U1.32
  Bottom 0.254: RN2.3 44.2,46.81 v44.37,46.38
MC1-F  (via drill 0.6)
  Top 0.254: v45.95,49.89 45.95,49.48 47.35,48.34 v47.35,39.29 | U1.26 45.31,32.44 45.64,32.13 v47.12,32.13
  Bottom 0.254: RN2.1 45.8,50.03 v45.95,49.89 | v47.35,39.29 47.32,32.36 v47.12,32.13
MC1-PE  (via drill 0.6)
  Top 0.254: v42.9,45.69 43.26,45.69 43.87,44.96 43.87,38.1 U1.33
  Bottom 0.254: RN2.4 43.4,46.2 v42.9,45.69
MC1-R  (via drill 0.6)
  Top 0.254: 45.29,47.95 v45.26,47.95 45.26,47.83 46.02,47.37 46.02,40.36 v45.97,40.26 | U1.27 v45.95,33.24 46.19,33.24 45.97,33.22
  Bottom 0.254: RN2.2 45,48.22 v45.26,47.95 | v45.97,40.26 45.97,34.38 v45.95,33.24
MC1-RE  (via drill 0.6)
  Top 0.254: v42.24,56.18 43.03,55.4 43.03,47.95 41.61,46.53 41.61,44.37 42.49,43.48 42.49,39.95 U1.34
  Bottom 0.254: v42.24,56.18 42.24,58.34 43.18,59.28 43.18,69.81 R17.1
MC-1-B
  Top 0.305: TP4.P$1 16.13,84.58 17.15,83.57 17.15,75.56 16.76,75.18 K3.8
  Bottom 0.305: TP4.P$1 15.49,86.11 14.61,86.99 8.05,86.99 6.71,88.29 6.71,94.01 6.02,94.74 4.98,94.74 CASE2.2
MC-1-T
  Top 0.305: CASE2.1 6.17,98.68 6.68,98.17 6.68,88.21 8.08,86.82 18.54,86.87 19.43,86.23 TP5.P$1 19.43,83.69 20.96,82.17 20.96,75.69 21.34,75.18 K3.3
MC-PG-EN  (via drill 0.6)
  Top 0.254: CASE2.28 55.09,98.68 56.49,97.28 56.49,64.29 54.56,62.36 39.5,62.36 v39.07,62.79 | R31.1 27.35,48.3 v27.74,48.69
  Bottom 0.254: v27.74,48.69 31.27,48.69 33.05,46.91 34.77,46.91 35.05,47.19 35.05,49.81 35.81,50.57 38.43,50.57 39.09,51.23 39.09,62.76 v39.07,62.79
MCRX
  Top 0.254: U14.4 33.85,53.17 | 33.85,53.17 34.06,52.96 34.06,48.72 34.21,48.56 36.24,48.56 RX.C | 33.85,53.17 33.85,61.1 34.19,61.44 37.24,61.44 37.47,61.67 37.47,65.13 37.21,65.38 35.99,65.38 K1.3
MCTX  (via drill 0.6)
  Top 0.254: U14.5 33.31,52.54 33.5,52.27 33.5,48.08 | TX.C 36.47,46.86 34.24,46.86 33.5,47.6 33.5,48.08 | 28.32,65.33 K1.8 30.56,65.3 v32.56,63.3 | v33.22,48.16 33.43,48.16 33.5,48.08
  Bottom 0.254: v32.56,63.3 32.56,62.66 33.1,62.13 33.1,48.51 33.2,48.21 v33.22,48.16
N$1  (via drill 0.6)
  Top 0.254: C22.1 15.52,38.51 JP9.1 15.93,38
  Top 0.305: S2.3 26.04,30.07 25.45,30.66 20.9,30.66 v20.52,30.28
  Top 0.406: SJ1.2 27.41,24.21 26.64,24.97 26.64,26.7 S2.3
  Bottom 0.254: R40.1 15.97,37.96 JP9.1
  Bottom 0.305: v20.52,30.28 20.52,37.41 19.99,37.95 R40.1
  Bottom 0.406: R41.1 28.98,22.53 26.64,24.87 26.64,26.7 S2.3
N$2  (via drill 0.5)
  Top 0.406: v38.15,30.68 38.3,30.23 38.33,30.2 38.33,28.29 U1.17
  Bottom 0.406: L3.1 C21.1 35.73,31.36 36.14,30.94 37.9,30.94 v38.15,30.68
N$3  (via drill 0.6)
  Top 0.406: v18.36,76.23 18.36,66.42 17.53,65.58 16.36,65.58 | 16.36,65.58 U7.2 | 16.36,65.58 16.29,65.58 U7.1
  Bottom 0.406: K3.7 17.52,77.72 R1.1 17.89,77.59 18.03,77.44 18.03,76.56 v18.36,76.23
N$4  (via drill 0.6)
  Top 0.254: v29.36,33.48 29.39,33.48 29.64,33.22 32.57,33.22 U1.7
  Bottom 0.254: C8.A 32.66,33.32 U1.7 29.6,33.24 v29.36,33.48
N$5
  Top 0.254: U1.22 43.97,28.24 R39.2
N$6
  Top 0.406: R43.1 +9V.A
N$7  (via drill 0.6)
  Top 0.254: v46.81,63.45 42.16,63.45 v41.81,63.8
  Bottom 0.254: RN2.8 45.8,57.41 46.48,58.09 46.48,63.12 v46.81,63.45 | v41.81,63.8 41.81,79.15 40.49,80.47 39.42,80.47 38.56,81.33 38.56,82.81 Q3.1
N$8  (via drill 0.6)
  Top 0.254: 39.14,28.2 U1.18 39.17,26.37 v39.07,25.93
  Bottom 0.254: R41.2 38.46,22.53 39.09,23.16 39.07,25.76 v39.07,25.93
N$9
  Bottom 0.813: Q3.3 37.57,89.69 CASE2.18
N$10
  Top 0.406: U9.1 30.07,23.57 SJ1.1
N$11
  Top 0.254: TX2.A R15.1
N$12
  Top 0.254: U1.8 19.43,32.44 17.81,30.81 15.24,30.81 JP9.4
N$13
  Top 0.254: U15.7 24.7,17.23 24.51,17.42 23.75,17.42 23.5,17.68 23.5,18.66 TX2.C
N$14
  Top 0.254: U15.14 27.24,8.44 RX2.C
N$15
  Top 0.254: U1.9 19.72,31.64 17.93,29.84 17.93,28.55 17.68,28.3 JP9.5
N$16
  Top 0.254: RX2.A R16.1
N$17
  Top 0.305: U16.1 21.65,61.67 | 21.65,61.67 21.65,63.72 U7.5 | TP3.P$1 21.65,61.67
N$18  (via drill 0.6)
  Top 0.406: v19.91,76.35 19.91,67.67 20.52,67.06 22.96,67.06 23.29,66.73 23.29,65.46 23.04,65.2 21.87,65.2 U7.7 U7.6
  Bottom 0.406: K3.4 20.2,77.72 R7.1 20.07,76.5 v19.91,76.35
N$19  (via drill 0.6)
  Top 0.254: U4.2 30.53,13.18 30.1,13.61 30.1,15.65 v30.35,15.9 | v26.29,17.55 26.54,17.3 26.54,16.07 U15.4
  Bottom 0.254: v30.35,15.9 26.71,15.9 U15.4 26.61,17.11 v26.29,17.55
N$20
  Bottom 0.254: RN2.7 45,57.83 45.62,58.45 45.62,64.82 46.69,65.89 46.69,68.83 46.94,69.09 46.94,74.27 47.5,74.83 47.5,76.91 46.66,77.75 45.74,77.75 Q5.1
N$21
  Bottom 0.305: K3.9 15.41,72.68 R3.1 22.95,72.68 K3.2
N$22
  Top 0.305: U17.1 17.46,62.18 | 17.46,62.18 17.46,64.2 17.09,64.57 U7.3 | TP8.P$1 17.43,62.33 17.46,62.18
N$23
  Top 0.254: LED2.A R21.1
N$24
  Top 0.254: U11.5 64.39,77.75 U10.3
N$25
  Top 0.406: R24.1 82.4,36.64 +3V.A
N$26  (via drill 0.6)
  Top 0.813: v46.58,80.39 44.75,80.39 44.42,80.72 44.42,87.22 42.57,89.08 42.57,98.04 41.91,98.7 40.61,98.7 CASE2.19
  Bottom 0.813: Q5.3 46.03,79.84 v46.58,80.39
N$27
  Top 0.254: U4.3 29.16,12.52 28.58,13.11 28.58,15.94 U15.1
N$28
  Top 0.254: U15.9 22.33,10.72 21.97,11.07 21.97,11.95 R52.2
N$29  (via drill 0.6)
  Top 0.254: v50.09,84.51 50.09,67.69 49.05,66.65 45.62,66.65 v45.34,66.37
  Bottom 0.254: RN2.6 44.2,57.92 44.96,58.67 44.96,65.99 v45.34,66.37 | Q6.1 49.34,83.75 v50.09,84.51
N$30
  Bottom 0.813: Q6.3 48.39,87.66 47.55,88.49 43.15,88.49 42.57,89.08 42.57,93.83 41.63,94.72 40.61,94.72 CASE2.20
N$31
  Top 0.254: TX1.A R18.1
N$32
  Top 0.254: RX1.A R5.1
N$33
  Top 0.254: U1.25 45.2,31.64 45.75,31.09 52.25,31.09 52.63,31.47 52.63,35.64 52.96,35.97 54.18,35.97 SJ3.2
N$35
  Bottom 0.254: R17.2 45.68,72.46 Q8.1
N$37
  Top 0.254: R39.1 LED7.A
N$39
  Top 0.254: U1.31 50.23,36.44 50.06,36.65 49.38,37.53 Y1.3 49.12,40.39 C24.1
N$40
  Top 0.254: C23.1 51.44,32.69 Y1.1 50.18,35.92 48.18,35.92 47.9,35.64 U1.30
N$41
  Top 0.406: R19.2 +5V.A
N$42
  Bottom 0.254: Q1.1 15.68,55.55 R4.2 15.63,53.69 R2.1
N$43
  Bottom 0.813: D4.A 16.05,67.69 15.29,68.45 15.29,70.03 K3.10 15.24,69.98 12.57,69.98 11.68,69.09 11.68,60.32 12.74,59.27 Q1.3
N$45
  Top 0.305: U8.7 86.61,69.34 86.11,68.83 86.11,67.7 R13.2 R14.1
N$54
  Top 0.254: U15.8 22.83,16 22.48,15.65 22.48,15 R53.2
N$55
  Top 0.406: R52.1 16.76,12.09 JP13.3
  Bottom 0.406: C11.1 16.76,12.09 JP13.3
N$59
  Top 0.254: C10.1 32.06,55.54 U14.1
N$61
  Top 0.406: R53.1 JP13.2
  Bottom 0.406: C13.1 JP13.2
N$62
  Top 0.254: SJ2.2 28.92,10.31 U15.16
N$63
  pour Top (no thermals): 74.12,78.74 71.02,78.74 70.74,79.02 70.74,81.99 71.07,82.32 73.96,82.32 74.12,82.17
N$65
  Top 0.254: U14.2 31.74,54.44 31.29,54 30.77,54 C10.2
N$66
  Top 0.254: U14.16 37.8,55.91 38.2,56.31 39.79,56.31 C12.1
N$67
  Top 0.254: U14.15 39.62,54.44 C12.2
N$68
  Top 0.254: U14.7 C15.1
N$69
  Top 0.254: R29.1 39.02,13.62 38.56,13.16 36.9,13.16 U4.7
N$70
  Bottom 0.813: Q7.3 44.58,86.03 43.69,86.92 41.68,86.92 40.64,87.96 40.64,90.65 CASE2.21
N$71  (via drill 0.6)
  Top 0.813: v46.38,75.29 46.38,78.05 47.65,79.32 47.65,79.35 47.98,79.68 47.98,87.38 46.48,88.87 46.48,97.92 45.72,98.68 CASE2.22
  Bottom 0.813: Q8.3 45.8,74.71 v46.38,75.29
N$72
  Top 0.254: U14.10 38.72,51.27 39.29,50.7 40.4,50.7 C17.2
N$73  (via drill 0.6)
  Top 0.254: v31.8,90.42 31.8,90.4 31.19,89.79 31.19,87.91 33.58,85.52 36.25,85.52 36.58,85.19 36.58,74.09 36.09,73.61 34.87,73.61 33.76,72.49 v33.76,72.36 | v35.26,51.99 35.26,52.15 35.64,52.53 37.78,52.53 U14.12
  Bottom 0.254: CASE2.40 87.43,98.68 84.63,101.47 34.44,101.47 32.51,99.54 32.51,91.13 v31.8,90.42 | v35.26,51.99 35.08,52.17 35.08,57.51 33.93,58.65 33.93,72.19 v33.76,72.36
N$74  (via drill 0.6)
  Top 0.254: v32.66,88.39 32.82,88.39 35.18,86.03 36.96,86.03 37.26,85.72 37.26,73.86 35.74,72.34 v35.23,72.34 | v36.09,53.54 36.45,53.19 37.78,53.19 U14.13
  Bottom 0.254: CASE2.41 86.92,94.69 85.62,95.99 85.62,99.52 84.23,100.91 34.8,100.91 33.12,99.24 33.12,88.85 v32.66,88.39 | v36.09,53.54 35.74,53.9 35.74,57.68 34.47,58.95 34.47,71.58 v35.23,72.34
N$75  (via drill 0.6)
  Top 0.254: v40.31,48.62 38.64,48.62 RX.A
  Bottom 0.254: R27.1 40.23,48.69 v40.31,48.62
N$76  (via drill 0.6)
  Top 0.254: v40.41,46.71 38.72,46.71 TX.A
  Bottom 0.254: R28.1 40.16,46.71 v40.41,46.71
N$77
  Top 1.016: K1.10 28.3,59.94 26.82,58.47 26.82,56.32 Q9.3
N$78
  Top 0.406: Q9.1 25.82,52.5 R30.1 25.77,50.44 R31.2
N$79
  Bottom 0.305: R20.2 53.09,73.91 U5.4
N$80
  Bottom 0.254: Q10.3 53.72,70 U5.3
N$81  (via drill 0.6)
  Top 0.254: v44.09,67.41 43.28,67.41 42.16,68.53 42.16,80.16 v42.85,80.85
  Bottom 0.254: RN2.5 43.4,58.26 44.2,59.05 44.2,67.31 v44.09,67.41 | v42.85,80.85 43.21,81.2 45.16,81.2 45.54,81.58 45.54,82.68 Q7.1
N$82
  Bottom 0.254: R22.2 48.56,68.99 Q10.1
N$85
  Top 0.254: 16.51,9.55 JP13.4 | C6.1 C3.A
  Top 0.305: 16.51,9.55 25.63,9.55 25.96,9.88 25.96,10.71 U15.12
  Top 0.406: C3.A 15.11,8.66 JP13.4
OUT
  Top 0.254: U6.5 25.93,78.79 25.15,78.13 25.15,73.3 24.66,72.82 24.66,60.43 24.1,59.94 24.1,57.86 23.04,56.79 23.04,44.53 25.1,42.47 37.41,42.47 39.14,40.54 U1.38
OUT-RX
  Top 0.254: CASE2.26 49.45,94.69 50.44,95.68 50.44,99.82 48.31,101.96 35.71,101.96 33.27,99.52 33.27,89.1 35.71,86.66 37.41,86.66 37.82,86.26 37.82,68.3 37.34,67.82 35.94,67.82 K1.4
OUT-TX
  Top 0.254: CASE2.25 48.51,100 47.42,101.09 35.86,101.09 34.26,99.49 34.26,89.15 35.84,87.58 37.87,87.58 38.35,87.1 38.35,67.36 37.54,66.55 29.59,66.55 K1.7
PUMP_OUTPUT_CONTROL
  Top 0.406: CASE2.31 64.9,98.7 62.87,98.7 59.79,95.63 59.79,85.93 60.1,85.62 63.65,85.62 64.02,85.26 R6.2 C9.1 64.07,82.63 U10.4 64.08,80.66 64.08,79.78 63.91,79.6 62.59,79.6 62.17,79.19 U10.1
RS-A  (via drill 0.6)
  Top 0.254: U2.6 69.11,68.55 68.45,69.21 68.45,86.11 v69.34,86.99
  Bottom 0.254: v69.34,86.99 69.85,86.99 70.87,88.01 70.87,92.71 CASE2.38 73.6,93.94 R32.1
RS-B
  Top 0.254: U2.7 67.84,87.66 68.58,88.39 71.5,88.39 72.77,89.66 72.77,90.63 CASE2.39
  Bottom 0.254: R32.2 74.08,91.94 CASE2.39
RX2  (via drill 0.5, 0.6)
  Top 0.254: K1.2 34.39,62.76 32.64,61.01 32.64,57.81 31.83,57 29.74,57 29.39,56.64 29.39,46.35 30.3,45.49 31.37,45.49 v31.57,45.29 | U1.42 35.98,41.21 v35.74,41.45
  Bottom 0.254: v31.57,45.29 31.6,42.14 32.11,41.63 35.51,41.63 v35.74,41.45
RX3  (via drill 0.6)
  Top 0.254: v38.63,9.85 38.63,12.06 38.15,12.55 36.9,12.55 U4.6 | U1.4 24.69,35.64 v24.23,35.18
  Bottom 0.254: v38.63,9.85 38.13,9.35 36.09,9.35 35.59,9.85 35.59,18.8 34.19,20.19 24.1,20.19 22.76,21.54 22.76,33.81 v24.23,35.18
RXD1  (via drill 0.6)
  Top 0.254: RX1.C 66.55,59.82 | 66.55,59.82 66.55,61.75 U2.1 | 66.55,59.82 66.34,59.82 65.38,58.85 65.38,30.76 64.34,29.72 64.34,28.63 66.62,26.34 67.06,25.88 v67.06,25.6 | U1.2 24.33,37.24 24,37.44 22.94,37.44 22.53,37.06 22.53,35.51 v22.81,35.23
  Bottom 0.254: v67.06,25.6 67.06,22.91 66.29,22.15 41.61,22.15 40.26,20.8 40.26,8.97 39.29,8 34.85,8 33.96,8.89 33.96,18.59 33.22,19.33 23.5,19.33 22.17,20.65 22.17,34.87 22.53,35.23 v22.81,35.23
SCL
  Top 0.254: Q2.2 21.02,47.17 | 21.02,47.17 R9.1 | 21.02,47.17 21.02,43.12 24.38,39.75 34.29,39.75 U1.44
SCL_5V  (via drill 0.5)
  Top 0.254: R11.1 18.02,52.95 v17.78,52.7 | U17.5 16.51,56.13 17.02,55.75 v17.78,55.75 20.32,55.75 20.7,56.13 U16.5
  Top 0.406: Q2.3 R11.1
  Bottom 0.254: v17.78,52.7 v17.78,55.75
SDA
  Top 0.254: Q4.2 16.7,47.17 | 16.7,47.17 R10.1 | 16.7,47.17 16.69,46 17.08,45.66 18.48,45.66 19.56,44.58 19.56,43.18 24.64,37.97 32.64,37.97 U1.1
SDA_5V
  Top 0.254: U17.4 15.56,58.36 15.88,58.67 19.43,58.67 19.69,58.42 19.69,57.62 U16.4 | 15.54,57.53 14.86,57.53 14.48,57.15 14.48,53.47 14.99,52.96 R12.1
  Top 0.406: Q4.3 R12.1 | 15.54,57.53 U17.4 | U16.4 19.75,57.34 19.69,57.28
SP1  (via drill 0.6)
  Top 0.305: U6.4 25.4,80.06 | 25.4,80.06 24.77,80.7 24.77,82.96 23.75,83.97 22.15,83.97 21.54,84.58 21.54,86.18 20.09,87.63 9.02,87.63 7.21,89.43 7.21,97.13 CASE2.4 | v25.58,79.76 25.58,79.88 25.4,80.06
  Bottom 0.305: RN3.1 27.25,79.76 26.95,80.06 25.88,80.06 v25.58,79.76
SP2  (via drill 0.6)
  Top 0.305: CASE2.6 8.89,89.15 9.65,88.39 20.47,88.39 22.3,86.56 22.3,84.91 22.58,84.63 24.03,84.63 25.4,83.26 25.4,81.58 25.7,81.28 v25.88,81.28 27.45,81.28 U6.3
  Bottom 0.305: RN3.2 28.05,80.78 U6.3 25.93,81.33 v25.88,81.28
SP3  (via drill 0.6)
  Top 0.305: v28.96,82.63 27.53,82.63 U6.2
  Bottom 0.305: CASE2.8 11.23,94.69 10.85,94.31 10.85,88.26 11.2,87.91 21.31,87.91 22.43,86.79 22.43,84.23 23.06,83.59 24.87,83.59 25.98,82.47 28.8,82.47 v28.96,82.63 28.85,82.52 RN3.3
SP4  (via drill 0.6)
  Top 0.305: v26.04,84.12 26.06,84.12 26.31,83.87 U6.1 27.55,83.92 29.49,83.92 29.9,83.51 v29.9,79.93
  Bottom 0.305: CASE2.10 15.27,98.68 14.83,98.25 14.83,89.41 15.37,88.87 21.44,88.87 23.16,87.15 23.16,84.68 23.6,84.25 25.91,84.25 v26.04,84.12 | RN3.4 29.65,79.69 v29.9,79.93
SP5  (via drill 0.6)
  Top 0.305: v31.55,82.52 33.03,82.52 U6.15
  Bottom 0.305: CASE2.12 16.81,90.83 18.75,92.76 22.12,92.76 22.96,91.92 22.96,88.67 24.18,87.45 24.18,85.65 24.56,85.27 29.16,85.27 30.12,84.3 30.12,83.16 30.76,82.52 v31.55,82.52 31.08,82.06 RN4.1
SP6  (via drill 0.6)
  Top 0.305: CASE2.14 20.83,94.69 23.06,92.46 23.06,86.46 23.95,85.57 29.24,85.57 30.51,84.33 30.51,81.79 30.89,81.38 33.05,81.38 U6.14 33.13,81.31 v34.59,81.31
  Bottom 0.305: RN4.2 31.88,81.18 32.08,81.38 34.39,81.38 v34.59,81.31
SP7  (via drill 0.6)
  Top 0.305: v34.62,79.96 33.25,79.96 U6.13
  Bottom 0.254: CASE2.16 34.98,98.68 34.09,97.79 34.09,84.38 35.56,82.91 35.56,80.11 35.36,79.91 34.67,79.91 v34.62,79.96
  Bottom 0.305: RN4.3 32.68,79.64 U6.13 34.57,80.06 v34.62,79.96
TEMP1  (via drill 0.6)
  Top 0.254: RN1.8 48.93,55.02 50.47,55.02 51.03,55.57 v51.03,56.16 51.31,56.44 54.79,56.44 57.02,54.2 57.02,31.04 56.02,30.04 U1.23
  Bottom 0.254: v51.03,56.16 51.16,56.29 54.64,56.29 57.48,59.13 57.48,90.73 61.42,94.67 64.9,94.67 CASE2.32
TEMP2  (via drill 0.6)
  Top 0.254: RN1.7 48.94,54.23 51.51,54.23 51.84,54.56 v51.84,54.66 52.15,54.97 54.46,54.97 56.44,52.98 56.44,31.29 55.73,30.58 45.54,30.58 45.29,30.84 U1.24
  Bottom 0.254: v51.84,54.66 54.15,54.66 58.55,59.05 58.57,59.21 58.57,90.07 61.19,92.56 66.17,92.56 66.95,93.34 66.95,96.75 CASE2.34
TEMP3  (via drill 0.6)
  Top 0.254: RN1.6 49.06,53.39 v54.2,53.39 55.83,51.76 55.83,39.95 54.28,38.4 54.28,37.59 SJ3.1
  Bottom 0.254: v54.2,53.39 60.02,59.16 60.02,86.41 61.47,87.86 61.49,87.86 61.93,88.29 68.15,88.29 68.86,89 68.86,90.68 CASE2.36
TX2  (via drill 0.6)
  Top 0.254: K1.9 30.63,62.76 32.08,61.32 32.08,58.09 31.6,57.61 29.57,57.61 28.85,56.9 28.85,45.47 v29.13,45.19 | U1.43 35.18,40.74 34.62,41.3 31.57,41.3 v31.19,40.92
  Bottom 0.254: v29.13,45.19 30.18,45.19 30.71,44.65 30.71,41.4 v31.19,40.92
TX3  (via drill 0.6)
  Top 0.254: v36.88,10.69 36.88,11.87 U4.5 | U1.5 25.26,34.84 v23.85,33.45
  Bottom 0.254: v36.88,10.69 36.4,10.69 36.12,10.97 36.12,19.02 34.42,20.73 24.49,20.73 23.24,21.97 23.24,32.87 23.6,33.22 v23.85,33.45
TXD1  (via drill 0.6)
  Top 0.254: U2.4 70.36,61.75 70.36,59.94 69.7,59.28 TX1.C 70.65,59.09 70.92,58.83 70.92,51.99 70.51,51.59 70.51,47.5 69.11,46.1 66.8,46.1 66.5,45.8 66.5,28.47 68.68,26.29 v68.68,25.88 | v23.62,36.52 23.75,36.4 32.54,36.4 U1.3
  Bottom 0.254: v68.68,25.88 68.68,23.19 67.01,21.51 42.01,21.51 40.94,20.45 40.94,8.74 39.5,7.29 34.7,7.29 33.32,8.66 33.32,18.31 32.84,18.8 23.16,18.8 21.69,20.27 21.69,35.48 22.71,36.5 23.6,36.5 v23.62,36.52
U5-RE/DE  (via drill 0.6)
  Top 0.254: U2.3 U2.2 68.4,61.77 68.45,61.72 68.45,54.36 68.2,54.1 66.37,54.1 65.86,53.59 65.86,29.97 v65.25,29.24 | v32.64,28.19 32.64,29.98 U1.11
  Bottom 0.254: v65.25,29.24 33.66,29.21 v32.64,28.19
UP/!DN
  Top 0.254: U11.2 61.85,69.04 60.43,67.61 60.43,62 58.65,60.22 58.65,25.6 56.24,23.19 36.47,23.19 35.26,24.41 35.26,28.16 U1.13
WDI
  Top 0.254: U1.10 31.45,30.84 30.81,30.2 30.81,28.02 31.67,27.15 32.77,27.15 32.94,26.97 32.94,26.26 U9.4

## Text on the board
Top: RJ
tPlace: D2
tNames: +5v
_tsilk: R6 | R21 | L2 | K3 | U6 | U5 | L1 | C9 | + | C1 | D2 | V1 | U10 | LED2 | D1 | K1 | C40 | C20 | U11 | U8 | R13 | U7 | C29 | C80 | C16 | U2 | R14 | U17 | RX1 | R12 | R8 | Q9 | U14 | C14 | TX1 | U12 | U16 | R11 | RN1 | C12 | IC1 | R30 | C10 | NTC | R5 | R18 | Q4 | Q2 | C17 | R31 | C15 | RX | R10 | R9 | TX | C7 | R24 | R19 | R43 | C22 | C24 | C32 | +5v | U1 | + | + | Y1 | +3V | +5V | +9V | C23 | + | SJ1 | R39 | S2 | U9 | LED7 | JP9 | TX2 | R15 | "MCS" / Motor Control System | R29 | R53 | U15 | SJ2 | R52 | C6 | R16 | RX2 | C3
_bsilk: R32 | Q3 | Q7 | Q6 | R1 | R7 | C34 | Q5 | R20 | RN4 | RN3 | R3 | Q8 | Q10 | R17 | D4 | C4 | C35 | C33 | C5 | R22 | Q1 | R4 | RN2 | R27 | R2 | R28 | C19 | C8 | R40 | L3 | C18 | C21 | R41 | C13 | C2 | C11